# Altium PCB LORA_ANT.PcbDoc
Units mm, origin at the board's own origin, x right, y up, seen from the top; angles counter-clockwise.
Board outline 28 x 17 mm, 2 copper layers (Top Layer, Bottom Layer), stack 0.871 mm thick; 6 components, 4 nets, 20 pads, 113 vias.
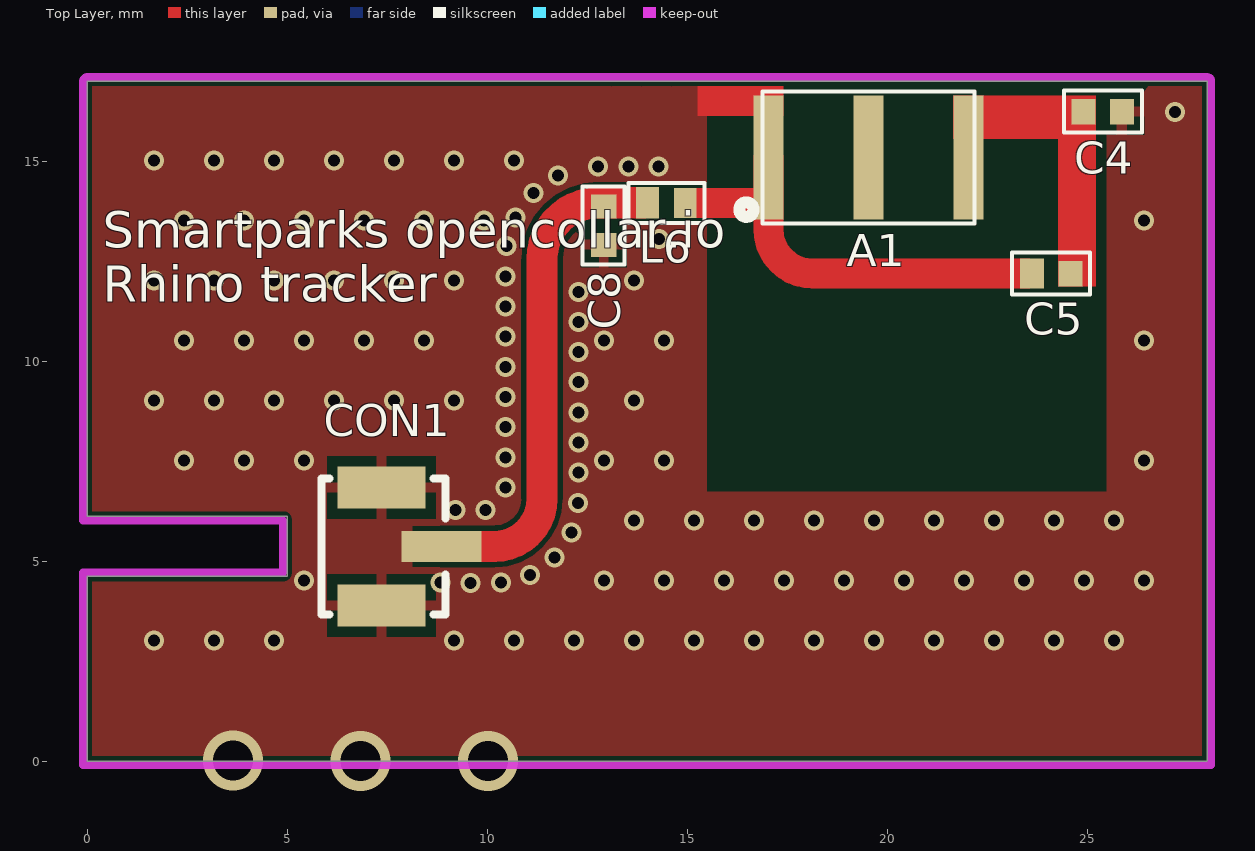
[diagram p0: Top Layer view]
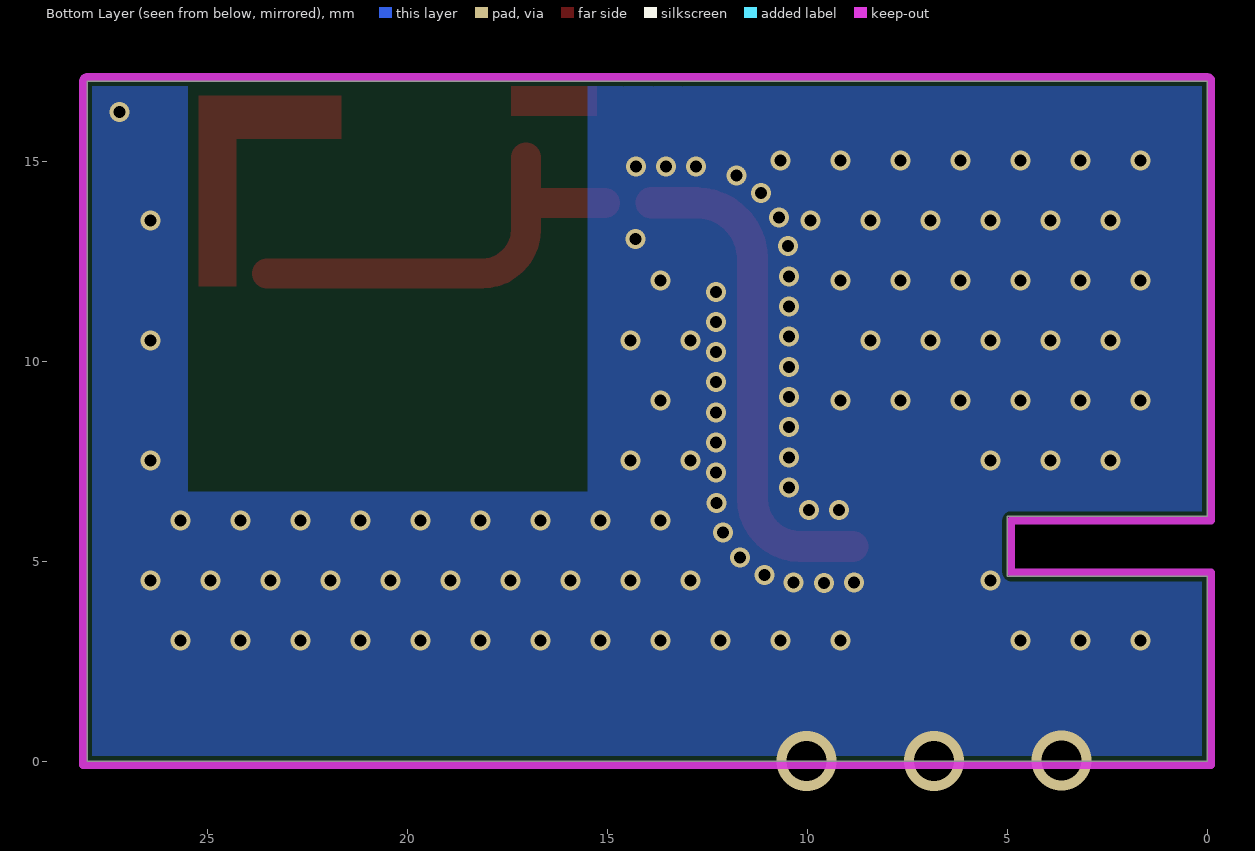
[diagram p1: Bottom Layer view, seen from below]
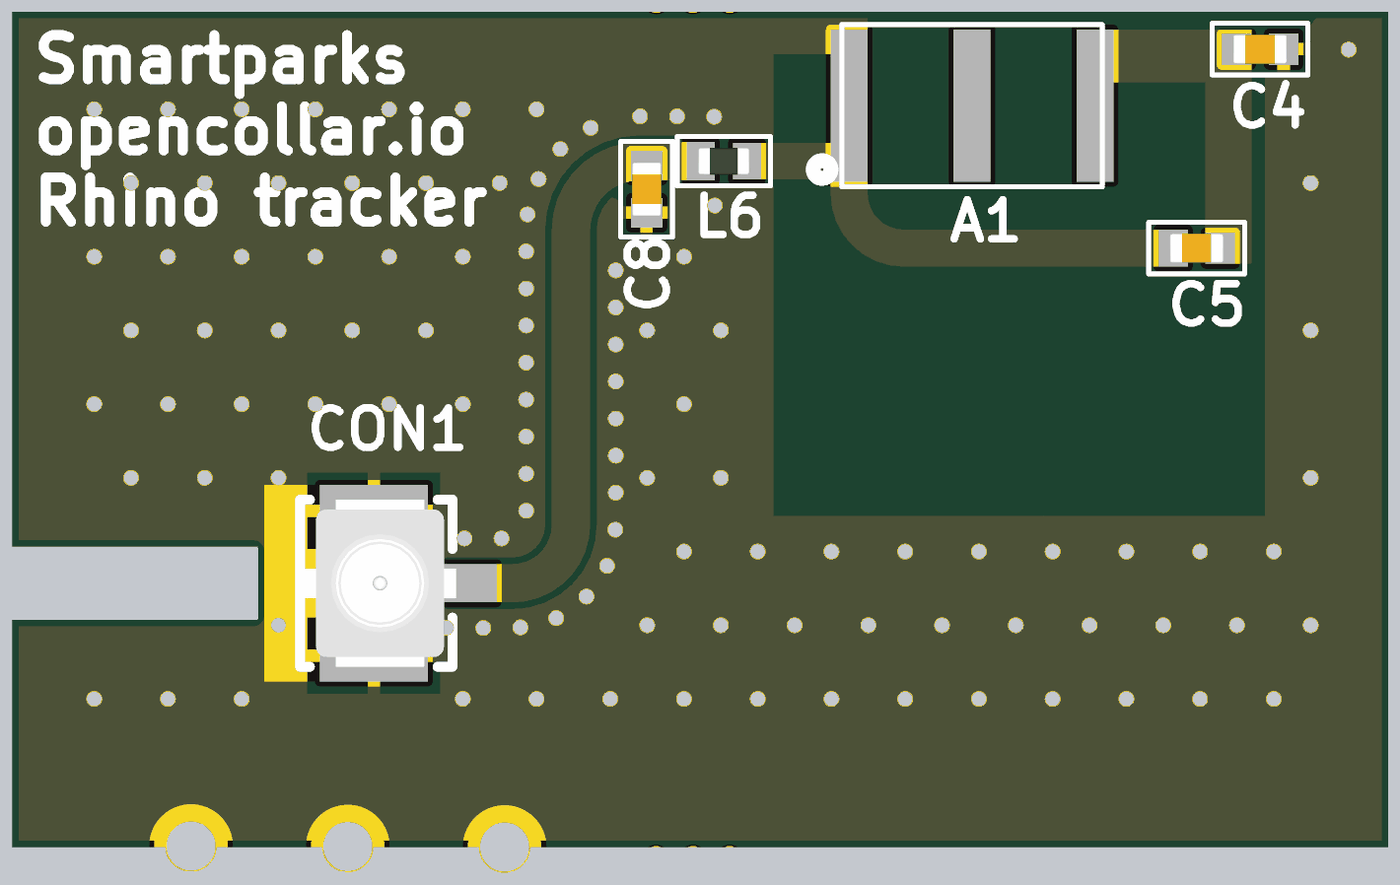
[diagram p2: 3D render of the assembled board from above, using the file's embedded part models]

## Layer stack, top to bottom
Top Solder: solder mask 0.0102, Solder Resist, Dk 3.5
Top Layer: signal copper 0.0356
Dielectric 1: dielectric 0.8, FR-4, Dk 4.8
Bottom Layer: signal copper 0.0356
Bottom Solder: solder mask 0.0102, Solder Resist, Dk 3.5

## Board outline
0,0 28,0 28,17 0,17 0,6.12 5,6.12 5,4.62 0,4.62

## Design rules (kind name [scope] priority, off if disabled: settings)
Clearance [All] p1: gap=0.127 ignorepadtopadclearanceinfootprint=FALSE
PolygonConnect [All] p1: thpad.connectstyle=Relief thpad.reliefconductorwidth=0.254 thpad.reliefentries=4 thpad.polygonreliefangle="90 Angle" thpad.airgapwidth=0.254 smdpad.connectstyle=Relief smdpad.reliefconductorwidth=0.254 smdpad.reliefentries=4 smdpad.polygonreliefangle="90 Angle" smdpad.airgapwidth=0.254 via.connectstyle=Direct via.reliefconductorwidth=0.254 via.reliefentries=4 via.polygonreliefangle="90 Angle" via.airgapwidth=0.254
RoutingVias [All] p1: holewidth=0.3 width=0.5 viastyle="Through Hole" minholewidth=0.3 minwidth=0.5 maxholewidth=0.711 maxwidth=1.27
SolderMaskExpansion [All] p1: expansion=0.102
Width [All] p1: maxlimit=2.54 minlimit=0.127 preferedwidth=0.254
30 further rules are at their usual default settings.

## Components (designator, comment, footprint, x,y, rotation, side; value= is the part's Value field where it differs from the comment)
A1 "ILA.08" ILA.08_LORA 19.53,15.09 r0 top
C4 "3.6pF" CAP0402#1 25.39,16.24 r0 top
C5 "1.5pF" CAP0402#2 24.1,12.19 r180 top
C8 "6.8pF" CAP0402#1 12.91,13.39 r90 top
CON1 "U.FL-R-SMT-1(10)" "ufl connector smd" 7.61,5.52 r270 top
L6 "6.8nH" IND0402 14.48,13.96 r0 top

## Footprints (in the part's own frame and the unit in brackets; to place one, negate y for a bottom-side part, rotate by r counter-clockwise, add the part's x,y. Pads: shape width x height; smd on the part's side, far side on the other; paste and mask are expansions set on the pad)
CAP0402#1 [mm] "Chip Capacitor, 2-Leads, Body 1.00x0.50mm, IPC Medium Density"
  rect 0.6x0.64 smd: 1(-0.48,0) 2(0.48,0)
  silkscreen extent -0.97,-0.53 0.97,0.53, body extent -0.55,-0.3 0.55,0.3, height 0.45
CAP0402#2 [mm] "Chip Capacitor, 2-Leads, Body 1.00x0.50mm, IPC Medium Density"
  rect 0.6x0.64 smd: 1(-0.48,0)
  rect 0.6x0.75 smd: 2(0.48,0)
  silkscreen extent -0.97,-0.53 0.97,0.53, body extent -0.55,-0.3 0.55,0.3, height 0.45
ILA.08_LORA [mm]
  rect 0.75x3.1 smd: 1(-2.5,0) 2(0,0) 3(2.5,0)
  silkscreen extent -3.23,-1.65 2.65,1.65, body extent -2.5,-1.5 2.5,1.5, height 0.5
IND0402 [mm] "Chip Inductor, 2-Leads, Body 1.00x0.50mm, IPC Medium Density"
  rect 0.57x0.78 smd: 1(-0.47,0)
  rect 0.57x0.75 smd: 2(0.47,0)
  silkscreen extent -0.95,-0.5 0.95,0.5, body extent -0.52,-0.27 0.53,0.28, height 0.55
"ufl connector smd" [mm]
  rect 0.78x2 smd: 1(0.15,1.248)
  rect 1.05x2.2 smd: 2(-1.325,-0.252) 2(1.625,-0.252)
  silkscreen extent -1.55,-1.75 1.85,1.35, body extent -1.55,-1.67 1.85,1.43, height 1.25

## Part data
A1: library part "ANT - ILA.08", "Antenna, ISM/Lora/Lpwan/Sigfox, 868Mhz Center Frequency, 5mm x 3mm x 0.5mm Dimensions", Manufacturer=Antenova, Manufacturer Part Number=SR42I010-R, Supplier Part Number 1=931-1408-ND, ComponentLink1Description=Datasheet, ComponentLink1URL=http://www.farnell.com/datasheets/2647030.pdf?_ga=2.119696523.2249963.1562564392-1373726713.1554121096&_gac=1.91489000.1562763802.CjwKCAjwmZbpBRAGEiwADrmVXm8xT8OHDZvJe8qZIQyyGmIuiUD-TEITatw0hIdDkyBwIXXCH7oneRoCl7cQAvD_BwE, Pricing 1="1 = 2.36000, 10 = 1.90000, 50 = 1.90000, 100 = 1.52000, 1000 = 1.07000, 10000 = 0.95900 (USD)", Stock 1=3154, Supplier 1=Digi-Key, Supplier 2=Mouser, Supplier Part Number 2=960-CGGP.18.2.A.02
C4 C5 C8: library part "C - 1.8pF/0402", "Multilayer Ceramic Capacitors MLCC - SMD/SMT 50volts 1.8pF C0G", Capacitance=1.8pF, Case/Package=0402, Case Code (Metric)=1005, Dielectric Material=Ceramic, IRNAS Part No.=/, Manufacturer=KEMET, Manufacturer Part Number=C0402C189B5GACTU, Max Operating Temperature=125°C, Min Operating Temperature=-55°C, Supplier Part Number 1=2820847, Voltage Rating=50V, Case Code (Imperial)=0402, ComponentLink1Description=https://datasheet.ciiva.com/5413/kem-c1003-c0g-smd-5413366.pdf, ComponentLink1URL=https://datasheet.ciiva.com/5413/kem-c1003-c0g-smd-5413366.pdf, Lead Free="Lead Free", Packaging="Tape and Reel", Pricing 1="10=0.463, 100=0.248, 500=0.182, 2500=0.153, 5000=0.134, 10000=0.11, 50000=0.0961 (EUR)", Stock 1=8950, Supplier 1=Farnell, Termination=SMD/SMT, Voltage Rating (DC)=50V
CON1: "RF / Coaxial Connector, U.FL Coaxial, Straight Jack, Surface Mount Vertical, 50 ohm, Brass", Dielectric Material="Liquid Crystal Polymer (LCP)", Frequency - Max=6GHz, Housing Color=Beige, Manufacturer=Hirose, Operating Temperature="-40°C ~ 90°C", Standard Package=2,500, Supplier Part Number 1=1688077, Voltage Rating=-, Body Finish=Silver, Body Material="Phosphor Bronze", Cable Group=-, Category="Connectors, Interconnects", Center Contact Material=Brass, Center Contact Plating=Gold, ComponentLink1Description=http://www.farnell.com/datasheets/91524.pdf, ComponentLink1URL=http://www.farnell.com/datasheets/91524.pdf, ComponentLink2Description=http://uk.rs-online.com/webdocs/1363/0900766b81363563.pdf, ComponentLink2URL=http://uk.rs-online.com/webdocs/1363/0900766b81363563.pdf, ComponentLink3Description=http://www.farnell.com/datasheets/1947917.pdf, ComponentLink3URL=http://www.farnell.com/datasheets/1947917.pdf, Connector Style="U.FL, Ultra Miniature Coaxial", Connector Type="Receptacle, Male Pin", Contact Termination=Solder, Family="Coaxial Connectors (RF)", Fastening Type=Snap-On, Featured Product="U.FL Series Connectors", Features=-, Impedance="50 Ohm", Ingress Protection=-, Manufacturer Part Number=U.FL-R-SMT-1(10), Mounting Type="Surface Mount", Online Catalog="UMCC (Ultra Miniature Coax Connectors), U.FL Series", Other Names="H11891TR  Q5400621  U.FL-R-SMT-1 10  U.FL-R-SMT-1(10)-ND  UFLRSMT110", Packaging="Tape & Reel (TR)", Series=U.FL, Shield Termination=Solder, Stock 1=0, Supplier 1=Farnell
L6: library part "L - 4.3nH/0402", "Inductor RF Chip Multi-Layer 4.3nH 0.3nH 100MHz 8Q-Factor Air 300mA 210mOhm DCR 0402 Paper T/R", Case/Package=0402, Case Code (Metric)=1005, Current=300mA, DC Resistance (DCR)=210mR, Inductance=4.3nh, IRNAS Part No.=/, Manufacturer=Murata, Manufacturer Part Number=LQG15HN4N3S02D, Max Operating Temperature=125°C, Min Operating Temperature=-55°C, Package Quantity=10000, Self Resonant Frequency=6GHz, Supplier Part Number 1=1711735, Test Frequency=100MHz, Case Code (Imperial)=0402, ComponentLink1Description=http://uk.rs-online.com/webdocs/0f10/0900766b80f10808.pdf?src-supplier=RSComponents, ComponentLink1URL=http://uk.rs-online.com/webdocs/0f10/0900766b80f10808.pdf?src-supplier=RSComponents, ComponentLink2Description=http://search.murata.co.jp/Ceramy/image/img/PDF/ENG/L0075S0083LQG15HN.pdf?src-supplier=Avnet, ComponentLink2URL=http://search.murata.co.jp/Ceramy/image/img/PDF/ENG/L0075S0083LQG15HN.pdf?src-supplier=Avnet, ComponentLink3Description=http://www.farnell.com/datasheets/66026.pdf?src-supplier=Element14, ComponentLink3URL=http://www.farnell.com/datasheets/66026.pdf?src-supplier=Element14, ComponentLink4Description=https://www.verical.com/server-webapp/html/getDatasheet?partID=31252&src-supplier=Verical, ComponentLink4URL=https://www.verical.com/server-webapp/html/getDatasheet?partID=31252&src-supplier=Verical, ComponentLink5Description=http://search.murata.co.jp/Ceramy/image/img/PDF/ENG/L0075S0083LQG15HN.pdf?src-supplier=Avnet+Europe, ComponentLink5URL=http://search.murata.co.jp/Ceramy/image/img/PDF/ENG/L0075S0083LQG15HN.pdf?src-supplier=Avnet+Europe, ComponentLink6Description=https://search.murata.co.jp/Ceramy/image/img/P02/partnumberingAT_LQ3E.pdf?src-supplier=Digi-Key, ComponentLink6URL=https://search.murata.co.jp/Ceramy/image/img/P02/partnumberingAT_LQ3E.pdf?src-supplier=Digi-Key, Core Material=Air, Current Rating=300mA, DC Current=300mA, Depth=0.55mm, Height=0.5mm, Height - Seated (Max)=0.022inch, Lead Free="Lead Free", Length=1.05mm, Max DC Current=300mA, Military Standard=Not, Mount="Surface Mount", Packaging="Tape and Reel", Pricing 1="1 = 0.10000, 10 = 0.06100, 100 = 0.04040, 500 = 0.03366, 1000 = 0.02827, 2500 = 0.02423 (USD)", Q Factor=8, Radiation Hardening=No, REACH SVHC="No SVHC", RoHS=Yes, Shielding=Unshielded, Stock 1=3502, Supplier 1=Farnell, Termination=SMD/SMT, Width=0.02inch

## Free pads (board coordinates)
  round 0.4 hole 0.5: 10(13.1,-0.25) 11(13.11,17.25) 11(13.85,17.25) 11(13.85,-0.25) 12(14.6,17.25) 12(14.6,-0.25)

## Via types
v1: diameter 0.5, hole 0.3, Top Layer to Bottom Layer, tented both sides, 110 vias
v2: diameter 1.5, hole 1, Top Layer to Bottom Layer, 3 vias

## Nets (pads, with @x,y where several pads share a name; then routed paths per layer and width w, separated by ;. In a path a pad name is that pad's centre, name@x,y a point inside that pad or via, vN(x,y) a via of type N, cw(c..) or ccw(c..) an arc to the next point about the centre after c; other vN are vias at no path point)
ANT: C8.2 CON1.1 L6.1 | length 12.5
  Top Layer w0.78: CON1.1 10.18,5.37 ccw(c10.18,6.56) 11.37,6.56 11.37,12.56 cw(c12.77,12.56) 12.77,13.96 L6.1@13.9,13.96
GND: C4.2 C8.1 CON1.2
  other v1: 1.67,3.015 3.17,3.015 4.67,3.015 9.17,3.015 10.67,3.015 12.17,3.015 13.67,3.015 15.17,3.015 16.67,3.015 18.17,3.015 19.67,3.015 21.17,3.015 22.67,3.015 24.17,3.015 25.67,3.015 9.586,4.458 8.832,4.464 10.34,4.472 5.42,4.515 12.92,4.515 14.42,4.515 15.92,4.515 17.42,4.515 18.92,4.515 20.42,4.515 21.92,4.515 23.42,4.515 24.92,4.515 26.42,4.515 11.07,4.661 11.684,5.099 12.104,5.725 13.67,6.015 15.17,6.015 16.67,6.015 18.17,6.015 19.67,6.015 21.17,6.015 22.67,6.015 24.17,6.015 25.67,6.015 9.203,6.282 9.957,6.282 12.274,6.459 10.458,6.845 12.282,7.213 2.42,7.515 3.92,7.515 5.42,7.515 12.92,7.515 14.42,7.515 26.42,7.515 10.458,7.599 12.282,7.967 10.458,8.353 12.282,8.721 1.67,9.015 3.17,9.015 4.67,9.015 6.17,9.015 7.67,9.015 9.17,9.015 13.67,9.015 10.458,9.107 12.282,9.475 10.458,9.861 12.282,10.229 2.42,10.515 3.92,10.515 5.42,10.515 6.92,10.515 8.42,10.515 12.92,10.515 14.42,10.515 26.42,10.515 10.458,10.615 12.282,10.983 10.458,11.369 12.282,11.737 1.67,12.015 3.17,12.015 4.67,12.015 6.17,12.015 7.67,12.015 9.17,12.015 13.67,12.015 10.458,12.123 10.486,12.876 14.297,13.057 2.42,13.515 3.92,13.515 5.42,13.515 6.92,13.515 8.42,13.515 9.92,13.515 26.42,13.515 10.711,13.596 11.154,14.206 11.771,14.639 12.775,14.872 13.529,14.872 14.283,14.864 1.67,15.015 3.17,15.015 4.67,15.015 6.17,15.015 7.67,15.015 9.17,15.015 10.67,15.015 27.19,16.23
  other v2: 6.83,0.01 10.02,0 3.64,0.02
NetA1_1: A1.1 C5.2 L6.2 | length 10.8
  Top Layer w0.75: L6.2@15.05,13.96 A1.1@16.988,13.96 ; A1.1 17.03,13.3 ccw(c18.14,13.3) 18.14,12.19 C5.2@23.51,12.19
NetA1_3: A1.3 C4.1 C5.1
pads on no net: A1.2

## Polygon pours and split planes (outlines as drawn)
GND on Bottom Layer "Bottom Layer-GND" (solid, remove dead copper, pour order 0): 0,17 28,17 28,0 0,0
GND on Top Layer "Top Layer-GND" (solid, remove dead copper, pour order 2): 0,17 0,0 28,0 28,17

## Keep-outs
Keep-Out Layer:
  lines w0.2: -0.1,17 cw(c0,17) 0,17.1 ; -0.1,17 cw(c0,17) 0,17.1 ; -0.1,17 -0.1,13.125 -0.1,6.02 4.9,6.02 4.9,4.72 -0.1,4.72 -0.1,-0.1 28.1,-0.1 28.1,17 ; 0,17.1 28,17.1 ; 28,17.1 cw(c28,17) 28.1,17 ; 28,17.1 cw(c28,17) 28.1,17

## Other copper
Top Layer:
  pour cut-out: 15.49,6.74 15.49,17 25.49,17 25.49,6.74
  region net GND: 15.268,16.869 17.405,16.869 17.405,16.134 15.268,16.134
  region net NetA1_3: 21.655,16.64 25.215,16.64 25.215,11.87 24.275,11.87 24.275,15.565 21.655,15.565
Bottom Layer:
  pour cut-out: 15.49,6.74 15.49,17 25.49,17 25.49,6.74

## Silkscreen, mask and mechanical layers (free items; w line width, h text height)
Top Overlay:
  text "Smartparks opencollar.io / Rhino tracker" at 0.39,11.49 h0.9
Top Solder:
  rectangle: 5.13,3.37 7.82,7.37
Bottom Solder:
  rectangle: 0,0 12.92,3.015
Route Tool Path:
  lines w1: -0.5,5.12 4.5,5.12 4.5,5.62 -0.5,5.62 ; -0.1,-0.5 12.1,-0.5 ; 0.1,17.5 12.1,17.5 ; 15.6,-0.5 28,-0.5 ; 15.6,17.5 28,17.5